# Altium PCB MC_5V_3V_LDO.PcbDoc
Units mil, origin at the board's own origin, x right, y up, seen from the top; angles counter-clockwise.
Board outline 1375 x 625 mil, 2 copper layers (Top Layer, Bottom Layer); 9 components, 4 nets, 22 pads, 0 vias.
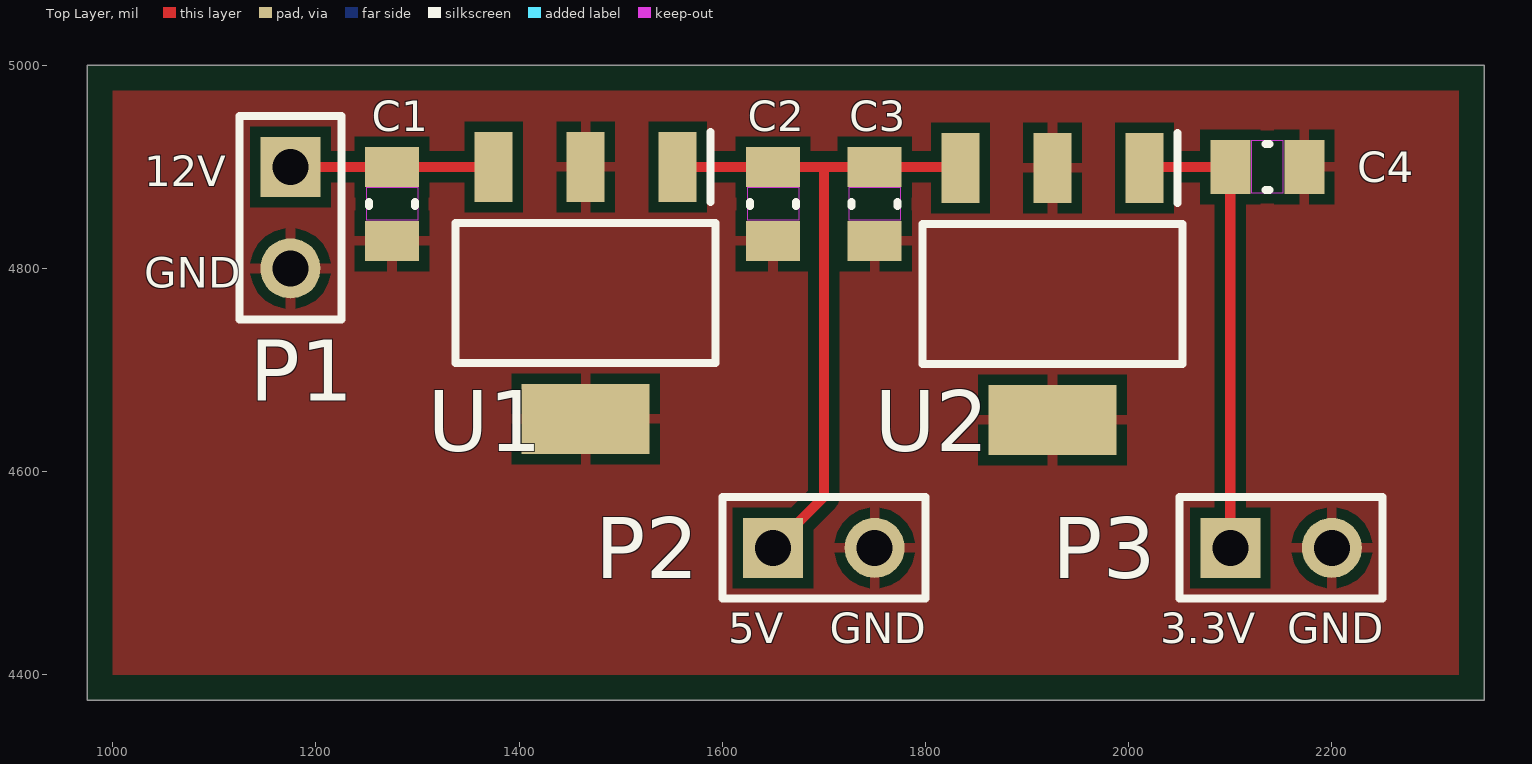
[diagram p0: Top Layer view]
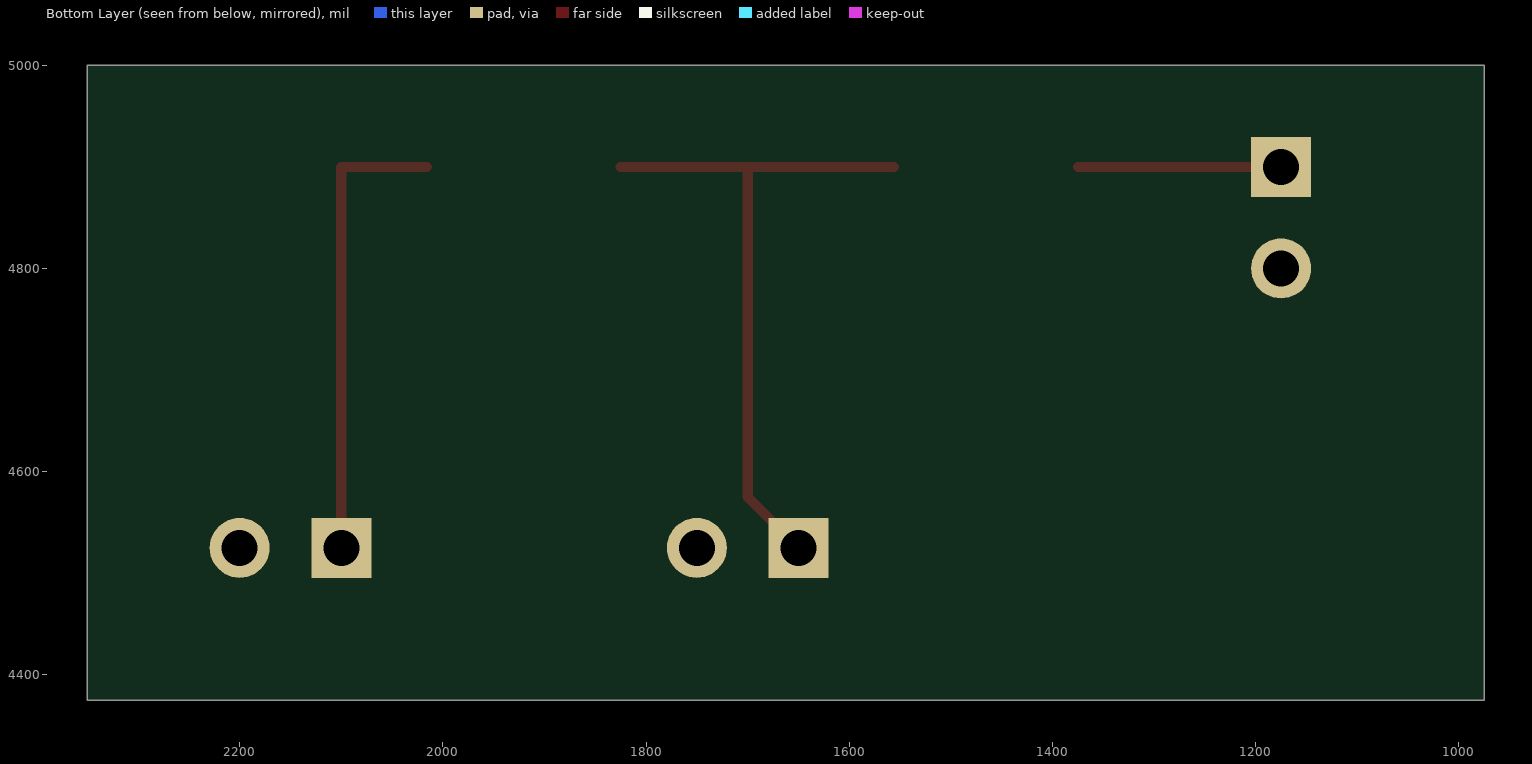
[diagram p1: Bottom Layer view, seen from below]
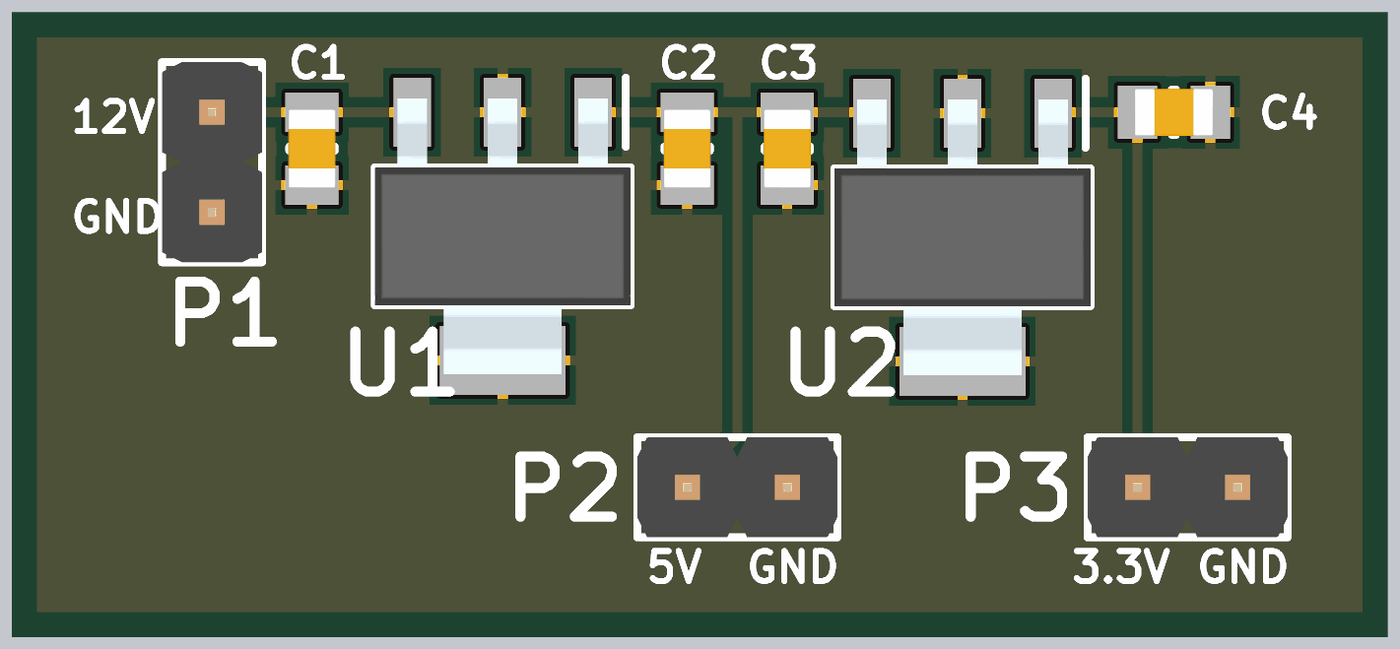
[diagram p2: 3D render of the assembled board from above, using the file's embedded part models]

## Layer stack, top to bottom
Top Solder: solder mask 0.4, Solder Resist, Dk 3.5
Top Layer: signal copper 1.4
Dielectric 1: dielectric 12.6, FR-4, Dk 4.8
Bottom Layer: signal copper 1.4
Bottom Solder: solder mask 0.4, Solder Resist, Dk 3.5

## Board outline
975,4375 2350,4375 2350,5000 975,5000

## Design rules (kind name [scope] priority, off if disabled: settings)
Clearance [All] p1: gap=10 ignorepadtopadclearanceinfootprint=FALSE except(0: Arc-Hole Track-Hole SMDPad-Hole THPad-Hole Via-Hole Fill-Hole Poly-Hole Region-Hole Text-Hole)
PolygonConnect [All] p1: connectstyle=Relief reliefconductorwidth=10 reliefentries=4 polygonreliefangle="90 Angle" airgapwidth=10
RoutingVias [All] p1: holewidth=28 width=50 viastyle="Through Hole" minholewidth=28 minwidth=50 maxholewidth=28 maxwidth=50
SolderMaskExpansion [All] p1: expansion=4 istentingtop=FALSE
Width [All] p1: maxlimit=10 minlimit=10 preferedwidth=10
30 further rules are at their usual default settings.

## Components (designator, comment, footprint, x,y, rotation, side; value= is the part's Value field where it differs from the comment)
C1 "Capacitor - Nonpolarized" "0805 - Capacitor" 1275,4863.58 r90 top value=1uF
C2 "Capacitor - Nonpolarized" "0805 - Capacitor" 1650,4863.58 r90 top value=1uF
C3 "Capacitor - Nonpolarized" "0805 - Capacitor" 1750,4863.58 r90 top value=1uF
C4 "Capacitor - Nonpolarized" "0805 - Capacitor" 2136.42,4900 r180 top value=1uF
P1 "1x2 Header" HDR1X2 1175,4900 r270 top
P2 "1x2 Header" HDR1X2 1650,4525 r0 top
P3 "1x2 Header" HDR1X2 2100,4525 r0 top
U1 "TLV1117-50IDCYR" TLV1117 1465.55,4775.98 r270 top
U2 "TLV1117-33IDCYR" TLV1117 1925,4775 r270 top

## Footprints (in the part's own frame and the unit in brackets; to place one, negate y for a bottom-side part, rotate by r counter-clockwise, add the part's x,y. Pads: shape width x height; smd on the part's side, far side on the other; paste and mask are expansions set on the pad)
"0805 - Capacitor" [mm] "0805 Chip Capacitor - IPC Medium Density"
  rect 1x1.35 smd: 1(-0.925,0) 2(0.925,0)
  Top Layer keep-out region: -0.4,0.65 -0.4,-0.65 0.4,-0.65 0.4,0.65
  silkscreen extent -0.05,-0.58 0.05,0.58, body extent -1,-0.6 1,0.6, height 1.2
HDR1X2 [mm] "Connector; Header; 2 Position"
  rect 1.5x1.5 hole 0.9: 1(0,0)
  round 1.5 hole 0.9: 2(2.54,0)
  silkscreen extent -1.27,-1.27 3.81,1.27, body extent -1.27,-1.27 3.81,1.27, height 8.54
TLV1117 [mm] "SOT230P700X180-4N"
  rect 1.75x0.95 smd: 1(-3.15,2.3) 2(-3.15,0) 3(-3.15,-2.3)
  rect 1.75x3.2 smd: 2(3.15,0)
  silkscreen extent -4.03,-3.25 1.75,3.25, body extent -3.5,-3.25 3.5,3.25, height 1.8

## Part data
C1 C2 C3 C4: "Nonpolarized Capacitor"
P1 P2 P3: "1x2 Pin Header"
U1: "Linear Voltage Regulator IC 5V 800MA SOT223-4", Manufacturer="Texas Instruments", Supplier Part Number=296-21115-1-ND, ComponentLink1Description=Datasheet, ComponentLink1URL=http://www.ti.com/lit/ds/symlink/tlv1117.pdf?HQS=TI-null-null-digikeymode-df-pf-null-wwe&ts=1590668900314, Manufacturer Part Number=TLV1117-50IDCYR, Supplier=Digikey
U2: "Linear Voltage Regulator IC 3.3V 800MA SOT223-4", Manufacturer="Texas Instruments", Supplier Part Number=296-21112-1-ND, ComponentLink1Description=Datasheet, ComponentLink1URL=http://www.ti.com/lit/ds/symlink/tlv1117.pdf?HQS=TI-null-null-digikeymode-df-pf-null-wwe&ts=1590668900314, Manufacturer Part Number=TLV1117-33IDCYR, Supplier=Digikey

## Nets (pads, with @x,y where several pads share a name; then routed paths per layer and width w, separated by ;. In a path a pad name is that pad's centre, name@x,y a point inside that pad or via, vN(x,y) a via of type N, cw(c..) or ccw(c..) an arc to the next point about the centre after c; other vN are vias at no path point)
3.3V: C4.2 P3.1 U2.1 | length 459.4
  Top Layer w10: U2.1@2015.55,4900 C4.2 P3.1
5V: C2.2 C3.2 P2.1 U1.1 U2.3 | length 664.6
  Top Layer w10: U1.1 C2.2 1700,4900 ; P2.1 1700,4575 1700,4900 ; U2.3@1825,4900 C3.2 1700,4900
12V: C1.2 P1.1 U1.3 | length 200
  Top Layer w10: P1.1 C1.2 U1.3
GND: C1.1 C2.1 C3.1 C4.1 P1.2 P2.2 P3.2 U1.2 U2.2

## Polygon pours and split planes (outlines as drawn)
GND on Top Layer "GND_L01_P000" (solid, pour order 0): 1000,4975 2325,4975 2325,4400 1000,4400

## Silkscreen, mask and mechanical layers (free items; w line width, h text height)
Top Overlay:
  text "12V" at 1031,4881 h30
  text "GND" at 1031,4781 h30
  text "5V" at 1606,4431 h30
  text "GND" at 1706,4431 h30
  text "3.3V" at 2031,4431 h30
  text "GND" at 2156,4431 h30